# Altium PCB imx6_base_board_lcd7_r1.PcbDoc (part 4 of 6)
Units mil, origin at the board's own origin, x right, y up, seen from the top; angles counter-clockwise.
Board outline 7480.32 x 5118.11 mil, 4 copper layers (Top Layer, Internal Plane 1, Internal Plane 2, Bottom Layer), stack 30.635 mil thick; 518 components, 398 nets, 1886 pads, 1407 vias.
Unrouted connection lines stored in the file: 12.
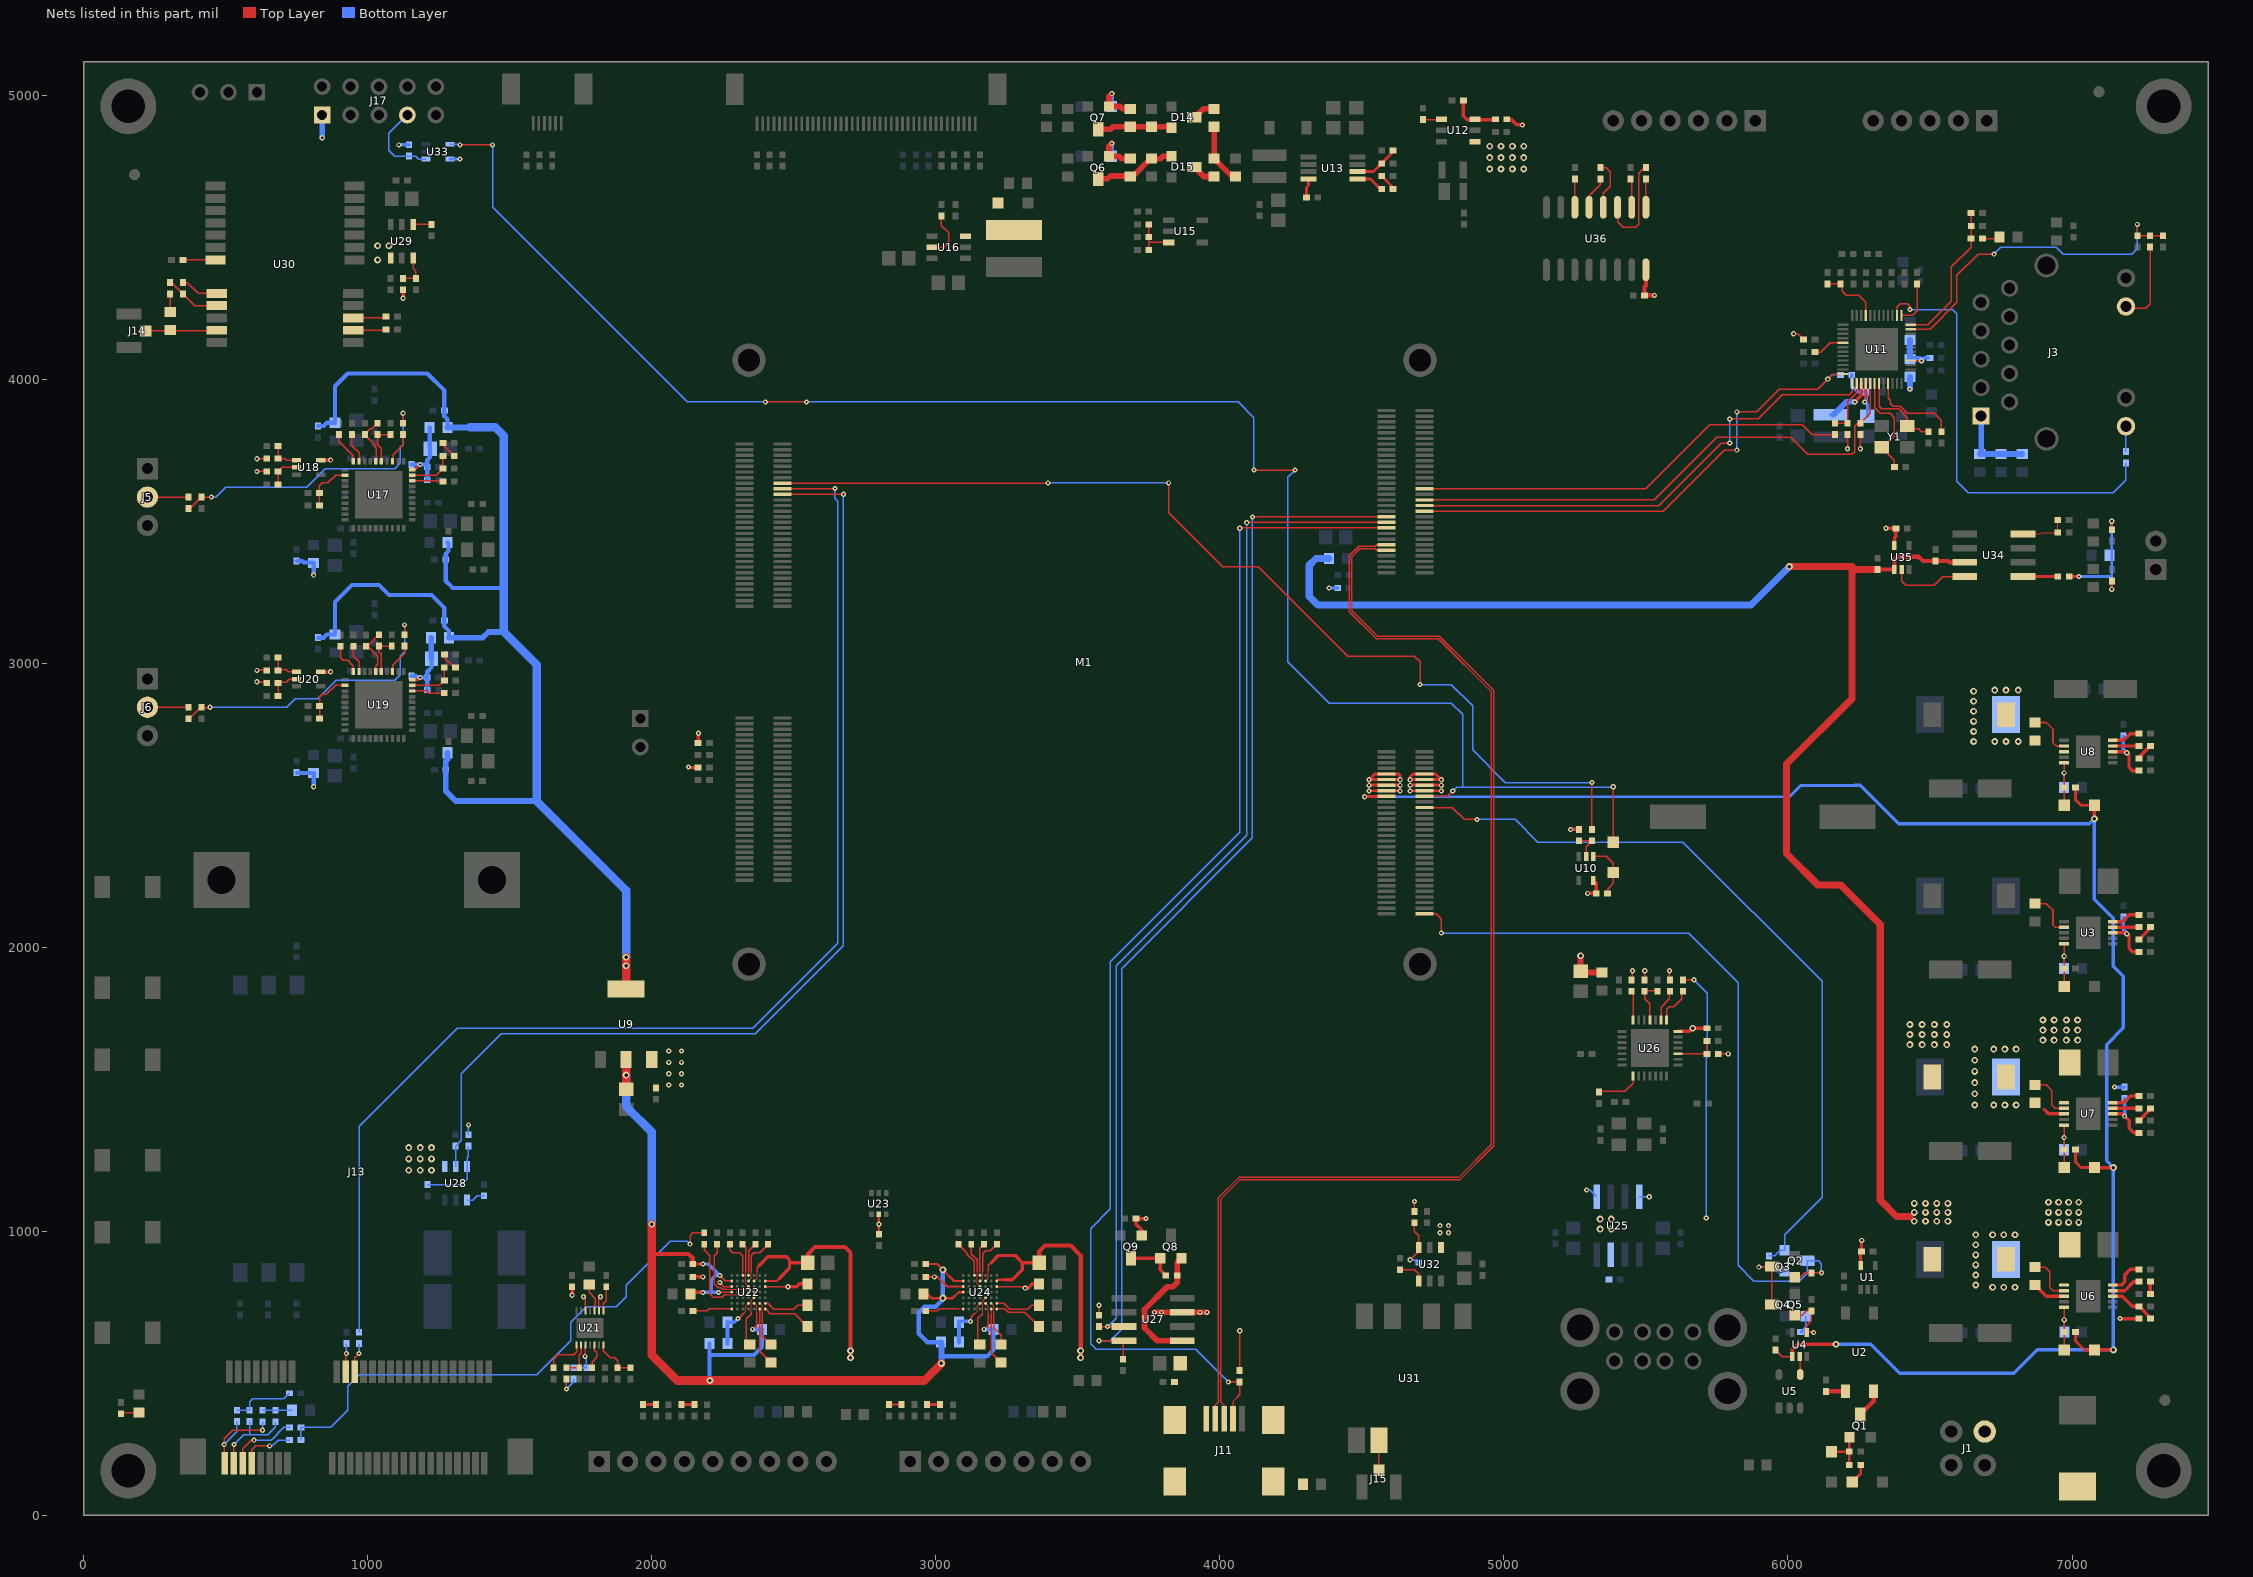
[diagram p6: the nets of this part, all layers, seen from the top]

## Via types
v1: diameter 18, hole 8, Top Layer to Bottom Layer, tented both sides, 875 vias
v2: diameter 24, hole 12, Top Layer to Bottom Layer, tented both sides, 532 vias

## Nets (pads, with @x,y where several pads share a name; then routed paths per layer and width w, separated by ;. In a path a pad name is that pad's centre, name@x,y a point inside that pad or via, vN(x,y) a via of type N, cw(c..) or ccw(c..) an arc to the next point about the centre after c; other vN are vias at no path point) (continued)
NetC3_2: C3.2 U3.2 | length 166.6
  Top Layer w6: C3.2@6870.08,2153.54 6909.45,2153.54 6933.07,2129.92 6933.07,2078.74 6940.94,2070.87 U3.2@6972.44,2070.87
NetC4_1: C4.1 D1.1 R4.1 U3.5 | length 192.9
  Top Layer w6: D1.1@6972.44,1862.2 U3.5@6972.44,2011.81
  Bottom Layer w6: C4.1@6972.44,1925.2 v1(6972.44,1968.5)
NetC5_1: C5.1 R6.1 | length 60
  Top Layer w12: C5.1@7235.97,2027.56 7276.22,2067.81 R6.1@7276.22,2070.87
NetC9_1: C9.1 D7.2 L2.1 U6.3 | length 118.7
  Top Layer w12: C9.1@6870.08,811.02 6909.45,771.65 U6.3@6972.44,771.65
  other v2: 6720.47,803.15 6759.84,803.15 6799.21,803.15 6661.42,811.02 6661.42,846.46 6661.42,881.89 6661.42,917.32 6661.42,952.76 6661.42,988.19 6720.47,988.19 6759.84,988.19 6799.21,988.19
NetC9_2: C9.2 U6.2 | length 168.9
  Top Layer w6: C9.2@6870.08,874.02 6905.51,874.02 6921.26,858.27 6921.26,803.15 6933.07,791.34 U6.2@6972.44,791.34
NetC10_1: C10.1 D6.1 R15.1 U6.5 | length 192.7
  Top Layer w6: U6.5@6972.44,732.28 R15.1@6972.44,645.67 6972.44,583.12 D6.1@6972.88,582.68
  Bottom Layer w6: C10.1@6972.88,645.67 v1(6972.88,688.54)
NetC11_1: C11.1 R17.1 | length 43.3
  Top Layer w12: C11.1@7276.03,779.53 R17.1@7276.03,822.83
NetC15_1: C15.1 D9.2 L3.1 U7.3 | length 77.4
  Top Layer w12: 6901.57,1429.13 6917.32,1413.39 U7.3@6972.44,1413.39
  other v2: 6657.48,1444.88 6724.41,1444.88 6763.78,1444.88 6803.15,1444.88 6657.48,1484.25 6657.48,1523.62 6657.48,1562.99 6657.48,1602.36 6657.48,1641.73 6724.41,1641.73 6763.78,1641.73 6803.15,1641.73
NetC15_2: C15.2 U7.2 | length 166.6
  Top Layer w6: C15.2@6870.08,1515.75 6909.45,1515.75 6929.13,1496.06 6929.13,1444.88 6940.94,1433.08 U7.2@6972.44,1433.08
NetC16_1: C16.1 D8.1 R21.1 U7.5 | length 192.9
  Top Layer w6: D8.1@6972.44,1224.41 U7.5@6972.44,1374.02
  Bottom Layer w6: C16.1@6972.44,1287.4 v1(6972.44,1330.71)
NetC19_1: C19.1 D11.2 L4.1 U8.3
  other v2: 6653.54,2724.41 6728.35,2724.41 6767.72,2724.41 6811.02,2724.41 6653.54,2759.84 6653.54,2795.28 6653.54,2830.71 6653.54,2866.14 6653.54,2901.57 6728.35,2905.51 6767.72,2905.51 6811.02,2905.51
NetC19_2: C19.2 U8.2 | length 164.3
  Top Layer w6: C19.2@6870.08,2791.34 6909.45,2791.34 6933.07,2767.72 6933.07,2720.47 6944.88,2708.67 U8.2@6972.44,2708.67
NetC20_1: C20.1 R22.1 | length 60
  Top Layer w12: C20.1@7235.78,1389.76 7276.03,1430.02 R22.1@7276.03,1433.07
NetC22_1: C22.1 D10.1 R25.1 U8.5 | length 200.8
  Top Layer w6: D10.1@6972.44,2500 v1(6972.44,2614.17) U8.5@6972.44,2649.61
  Bottom Layer w6: C22.1@6972.44,2562.99 v1(6972.44,2614.17)
NetC23_1: C23.1 R27.1 | length 60
  Top Layer w12: C23.1@7235.78,2665.35 7235.78,2668.41 R27.1@7276.03,2708.66
NetC31_1: C31.1 C32.1 L5.2 U11.16 | length 176.3
  Top Layer w4.7: U11.16@6432.54,4065.42 6469.58,4065.42 v1(6470,4065)
  Bottom Layer w12: v1(6470,4065) 6480,4075 C32.1@6494.87,4075
  Bottom Layer w20: C31.1@6430,4138.5 L5.2@6430,4071.5 6463.5,4071.5 v1(6470,4065)
NetC41_1: C41.1 C42.1 C43.1 J3.1 | length 285.6
  Bottom Layer w20: J3.1@6680.09,3870 6680.09,3741.59 C41.1@6675,3736.5 C42.1@6750,3736.5 C43.1@6825,3736.5
NetC45_1: C45.1 U11.6 Y1.1 | length 384.8
  Top Layer w4.7: U11.6@6305.08,3985.2 6305.08,3899.92 6325,3880 6360,3880 6375,3865 6375,3800 6335,3760 Y1.1@6330,3760 6374.87,3715.13 C45.1@6374.87,3690
NetC46_1: C46.1 U11.7 Y1.3 | length 309.4
  Top Layer w4.7: U11.7@6320.82,3985.2 6320.82,3904.18 6330,3895 6390,3895 6420.56,3864.44 Y1.3@6420.56,3834.8 6430.36,3825 6460,3825 6469.87,3815.13 C46.1@6495,3815.13
NetC47_2: C47.2 R61.2 U12.6 | length 174.3
  Top Layer w12: C47.2@4857.47,4980.71 4857.47,4927.53 4871.22,4913.78 4900.59,4913.78 4967.33,4913.78 R61.2@4971.27,4917.72
NetC49_1: C49.1 D14.2 Q7.1 R60.1 | length 263
  Top Layer w20: Q7.1@3572,4880 3615,4880 3623.5,4888.5 R60.1@3685,4888.5 C49.1@3760,4888.5 3826.5,4888.5 D14.2@3830,4885
NetC52_1: C52.1 D15.1 Q6.1 R59.1 | length 292.4
  Top Layer w20: Q6.1@3572,4705 3605,4705 3615,4715 3683.5,4715 R59.1@3685,4713.5 3693.5,4713.5 3756.5,4776.5 C52.1@3760,4776.5 3791.5,4776.5 3800,4785 D15.1@3830,4785
NetC53_1: C53.1 C54.2 R63.1 | length 213.1
  Top Layer w20: C54.2@3980,4888.5 C53.1@3980,4776.5 4042.99,4713.5 R63.1@4055,4713.5
NetC53_2: C53.2 D15.3 | length 83.9
  Top Layer w20: D15.3@3910,4747 3943.5,4713.5 C53.2@3980,4713.5
NetC54_1: C54.1 D14.3 | length 82.2
  Top Layer w20: D14.3@3910,4922 3912,4922 3941.5,4951.5 C54.1@3980,4951.5
NetC59_1: C59.1 R67.2 | length 61.6
  Top Layer w10: C59.1@4569.87,4715 4609.87,4675 R67.2@4609.87,4670
NetC60_1: C60.1 U13.8 | length 67.9
  Top Layer w10: C60.1@4304.87,4640 4305,4640.13 4305,4675 4311.77,4681.77 U13.8@4311.77,4705
NetC62_1: C62.1 R68.2 R70.1 U15.3 | length 160.8
  Top Layer w4.7: R68.2@3749.87,4455 3749.87,4480 ; C62.1@3750.13,4545 3749.87,4544.75 3749.87,4480 ; U15.3@3820,4481.26 3751.13,4481.26 3749.87,4480
NetC66_1: C66.1 U16.5 | length 169.8
  Top Layer w4.7: U16.5@2986.89,4464.37 3029.37,4464.37 3045,4480 3045,4515 3020,4540 C66.1@3020,4574.87
NetC80_1: C80.1 U17.30 | length 114.4
  Top Layer w4.7: C80.1@900,3804.87 900,3780 950,3730 U17.30@950,3711.22
NetC81_1: C81.1 U17.29 | length 103.9
  Top Layer w4.7: C81.1@945,3804.87 945,3765 969.68,3740.31 U17.29@969.68,3711.22
NetC82_1: C82.1 R87.1 R88.2 | length 1025.3
  Top Layer w4.7: R87.1@370,3544.87 375,3544.87 R88.2@415,3584.87 449.87,3584.87 v1(450,3585) ; C82.1@1125,3845.13 v1(1125,3880)
  Bottom Layer w4.7: v1(450,3585) 465,3585 500,3620 785,3620 850,3685 1095,3685 1115,3705 1115,3760 1125,3770 v1(1125,3880)
NetC82_2: C82.2 U17.23 | length 109.3
  Top Layer w4.7: U17.23@1087.8,3711.22 1087.8,3732.8 1125,3770 C82.2@1125,3805.13
NetC83_2: C83.2 R92.2 | length 61.5
  Top Layer w4.7: C83.2@1265.13,3775 1265.13,3769.75 R92.2@1304.87,3730
NetC84_1: C84.1 C87.1 U17.26 | length 172.4
  Top Layer w4.7: U17.26@1028.74,3711.22 1030,3712.48 1030,3756.58 1025.3,3761.28 1025.3,3769.57 C87.1@990,3804.87 1010.13,3825 1014.87,3825 C84.1@1035,3845.13
NetC84_2: C84.2 C85.2 U17.25 | length 144.5
  Top Layer w4.7: U17.25@1048.43,3711.22 1048.43,3756.57 1035,3770 C84.2@1035,3805.13 C85.2@1080,3805.13
NetC86_2: C86.2 R92.1 U17.19 | length 163.1
  Top Layer w4.7: U17.19@1156.69,3662.01 1242.13,3662.01 C86.2@1265.13,3685 1265.13,3729.75 R92.1@1264.87,3730
NetC110_1: C110.1 U19.29 | length 96.8
  Top Layer w4.7: C110.1@950,3059.87 950,3025 969.68,3005.32 U19.29@969.68,2971.22
NetC111_1: C111.1 U19.30 | length 116.1
  Top Layer w4.7: C111.1@905,3059.87 905,3020 915,3010 930,3010 950,2990 U19.30@950,2971.22
NetC112_1: C112.1 R100.1 R101.2 | length 1025.3
  Top Layer w4.7: R100.1@370.71,2803.38 410.71,2843.38 443.38,2843.38 v1(445,2845) ; C112.1@1130,3100.13 v1(1130,3135)
  Bottom Layer w4.7: v1(445,2845) 715,2845 745,2875 825,2875 890,2940 1095,2940 1115,2960 1115,3025 1130,3040 v1(1130,3135)
NetC112_2: C112.2 U19.23 | length 106.4
  Top Layer w4.7: U19.23@1087.8,2971.22 1087.8,2992.8 1130,3035 C112.2@1130,3060.13
NetC113_2: C113.2 R105.2 | length 64.3
  Top Layer w4.7: C113.2@1270.13,3030 1270.13,3019.87 1305,2985 R105.2@1309.87,2985
NetC114_1: C114.1 C117.1 U19.26 | length 167.7
  Top Layer w4.7: C117.1@995,3059.87 C117.1@999.75,3059.87 ; U19.26@1028.74,2971.22 1028.74,2990 1035,2996.26 1035,3025 1000.13,3059.87 C117.1@999.75,3059.87 ; C114.1@1040,3100.13 C117.1@999.75,3059.87
NetC114_2: C114.2 C115.2 U19.25 | length 137.4
  Top Layer w4.7: U19.25@1048.43,2971.22 1048.43,3031.57 1040,3040 C114.2@1040,3060.13 C115.2@1085,3060.13
NetC116_2: C116.2 R105.1 U19.19 | length 166
  Top Layer w4.7: U19.19@1156.69,2922.01 1252.13,2922.01 C116.2@1270.13,2940 1269.87,2940.25 R105.1@1269.87,2985
NetC129_1: C129.1 U21.12 | length 89.8
  Top Layer w4.7: C129.1@1790,520.13 1790,540 1806.35,556.35 1806.35,573.65 1798.51,581.49 U21.12@1798.51,599.92
NetC130_1: C130.1 U21.8 | length 145.4
  Top Layer w4.7: C130.1@1655,520.13 1655,550 1670,565 1725,565 1735.52,575.52 U21.8@1735.52,599.92
NetC131_1: C131.1 U21.3 | length 103.5
  Top Layer w4.7: C131.1@1780,813.5 1780,785 1801.35,763.65 1801.35,741.35 1798.51,738.51 U21.3@1798.51,720
NetC132_1: C132.1 U21.1 | length 89
  Top Layer w4.7: U21.1@1830,720 1830,745 1840,755 C132.1@1840,804.87
NetC136_1: C136.1 R122.1 | length 45
  Top Layer w10: R122.1@2105,390.13 C136.1@2150,390.13
NetC137_1: C137.1 R121.1 | length 45
  Top Layer w10: R121.1@1970,390.13 C137.1@2015,390.13
NetC139_2: C139.2 L18.2 U22.D6 | length 196.2
  Top Layer w3: 2326,713 2331,718 2331,736.63 U22.D6@2340.94,746.57
  Top Layer w4.7: v1(2303.95,693) 2305.95,691 2304,692.95 2304,691 2326,713
  Bottom Layer w12: C139.2@2266.5,680 2290.95,680 v1(2303.95,693)
  Bottom Layer w15: L18.2@2266.5,605 C139.2@2266.5,680
NetC142_1: C142.1 U22.C4 | length 296.7
  Top Layer w3: 2264,796 2350.57,796 U22.C4@2360.63,785.94
  Top Layer w4.7: C142.1@2230,954.87 2230,925 2220,915 2220,815 2233.65,801.35 2243.65,801.35 2249,796 2264,796
NetC143_1: C143.1 U22.D4 | length 331
  Top Layer w3: 2264,776 2331,776 U22.D4@2340.94,785.94
  Top Layer w4.7: C143.1@2185,954.87 2185,935 2205,915 2205,780 2216.35,768.65 2248.65,768.65 2256,776 2264,776
NetC143_2: C143.2 R165.2 R167.2 | length 1885.8
  Top Layer w4.7: v1(2135,955) 2135,985 2144.87,994.87 C143.2@2185,994.87
  Bottom Layer w4.7: R167.2@765,265 R165.2@765,310 870,310 930,370 930,455 970,495 1595,495 1715,615 1715,680 1770,735 1875,735 1910,770 1910,810 2065,965 2125,965 v1(2135,955)
NetC144_1: C144.1 U22.B7 | length 204.8
  Top Layer w4.7: U22.B7@2380.3,726.87 2380.3,578.2 C144.1@2420,538.5
NetC144_2: C144.2 U22.B6 | length 161.6
  Top Layer w3: U22.B6@2380.31,746.57 2389.88,737 2390,737 2390,713
  Top Layer w4.7: 2390,713 2390,631.5 C144.2@2420,601.5
NetC145_2: C145.2 U22.A6 | length 163.7
  Top Layer w4.7: U22.A6@2400,746.57 2408.43,746.57 2430,725 2500,725 2515,740 C145.2@2548.5,740
NetC146_2: C146.2 U22.A7 | length 174.1
  Top Layer w4.7: U22.A7@2400,726.88 2401.12,726.88 2418,710 2503.5,710 C146.2@2548.5,665
NetC148_2: C148.2 U22.C5 | length 180.9
  Top Layer w3: 2351,715 2351,757 2360.25,766.25 U22.C5@2360.63,766.25
  Top Layer w4.7: C148.2@2345,601.5 2333.65,612.85 2333.65,691.65 2351,709 2351,715
NetC152_1: C152.1 R132.1 | length 45
  Top Layer w10: R132.1@2970,390.13 C152.1@3015,390.13
NetC153_1: C153.1 R134.1 | length 45
  Top Layer w8: R134.1@2835,390.13 C153.1@2880,390.13
NetC155_2: C155.2 L20.2 U24.D6 | length 194.7
  Top Layer w3: 3136.96,709.48 3146.44,718.96 3146.44,737.07 U24.D6@3155.94,746.57
  Top Layer w4.7: v1@3118,683 v1(3122.6,683) 3122.6,696.32 3136.36,710.08
  Bottom Layer w12: C155.2@3081.5,680 3084.5,683 v1(3122.6,683)
  Bottom Layer w15: L20.2@3081.5,610 C155.2@3081.5,680
NetC158_1: C158.1 U24.B7 | length 203
  Top Layer w3: 3195,710 3195.31,710.31 U24.B7@3195.31,726.88
  Top Layer w4.7: 3195,710 3195,573.5 C158.1@3230,538.5
NetC158_2: C158.2 U24.B6 | length 159.4
  Top Layer w3: U24.B6@3195.31,746.57 3205,736.88 3205,710
  Top Layer w4.7: 3205,710 3205,660 3230,635 C158.2@3230,601.5
NetC159_2: C159.2 U24.A6 | length 163.8
  Top Layer w4.7: U24.A6@3215,746.57 3215,746.37 3238.63,746.37 3260,725 3323.12,725 3338.12,740 C159.2@3363.5,740
NetC160_2: C160.2 U24.A7 | length 174.1
  Top Layer w4.7: U24.A7@3215,726.88 3243.12,726.88 3255,715 3313.5,715 C160.2@3363.5,665
NetC161_2: C161.2 U24.C5 | length 178.6
  Top Layer w3: 3165,710 3165.44,710.44 3165.44,755.44 3175.63,765.63 U24.C5@3175.63,766.25
  Top Layer w4.7: C161.2@3155,601.5 3148.65,607.85 3148.65,693.65 3165,710
NetC178_2: C178.2 R158.2 U28.6 | length 265.5
  Bottom Layer w4.7: C178.2@1210,1164.87 1329.87,1164.87 1350,1185 U28.6@1350,1228.11 1350,1260 1355,1265 R158.2@1355,1300.13
NetC185_1: C185.1 R161.1 R162.1 | length 227.1
  Bottom Layer w4.7: R161.1@540,370.25 R162.1@585,370.25 585,400 595,410 704.75,410 C185.1@724.87,430.13
NetC186_1: C186.1 R163.2 R164.2 | length 103.6
  Bottom Layer w4.7: R163.2@630,370 R164.2@675,370 733.38,370 C186.1@733.5,370.13
NetC187_2: C187.2 R170.2 U29.6 | length 121.2
  Top Layer w4.7: R170.2@1125,4354.87 C187.2@1170,4354.87 1170,4380 1160,4390 U29.6@1160,4426.89
NetC190_2: C190.2 R178.2 U32.6 | length 185.1
  Top Layer w4.7: v1(4670,900) 4700,930 U32.6@4700,943.11 4700,985 4685,1000 R178.2@4685,1030.13
  Bottom Layer w4.7: v1(4670,900) 4685.13,900 C190.2@4700.13,885
NetC198_1: C198.1 R182.2 R183.1 R184.1 | length 449.9
  Top Layer w10: R183.1@6990.13,3305 v1(7025,3305) ; v1(7140,3260) R184.1@7140,3289.87 ; R182.2@7140,3469.87 v1(7140,3500)
  Bottom Layer w10: v1(7025,3305) 7140,3305 ; v1(7140,3260) 7140,3305 ; v1(7140,3500) 7140,3305
NetC200_1: C200.1 U36.1 | length 99.9
  Top Layer w4.7: U36.1@5500,4605 C200.1@5500,4704.87
NetC200_2: C200.2 U36.3 | length 350.7
  Top Layer w4.7: U36.3@5400,4605 5400,4555 5420,4535 5465,4535 5475,4545 5475,4725 5494.87,4744.87 C200.2@5500,4744.87
NetC201_1: C201.1 U36.2 | length 101.9
  Top Layer w4.7: C201.1@5445,4704.87 5450,4699.87 U36.2@5450,4605
NetC202_1: C202.1 U36.6 | length 99.9
  Top Layer w4.7: U36.6@5250,4605 C202.1@5250,4704.87
NetC203_1: C203.1 U36.4 | length 176.6
  Top Layer w4.7: C203.1@5340,4745.13 5359.87,4745.13 5375,4730 5375,4680 5350,4655 U36.4@5350,4605
NetC203_2: C203.2 U36.5 | length 116.7
  Top Layer w4.7: U36.5@5300,4605 5300,4645 5340,4685 C203.2@5340,4705.13
NetD2_2: D2.2 R5.2 | length 71.4
  Top Layer w10: D2.2@6226.38,118.11 6256.09,147.83 R5.2@6256.09,177.17
NetD4_2: D4.2 Q1.2 R5.1 R7.1 | length 161.2
  Top Layer w10: D4.2@6153.54,224.41 R7.1@6216.09,224.41 ; R5.1@6216.09,177.17 R7.1@6216.09,224.41 ; Q1.2@6216.54,275.59 6216.09,275.15 R7.1@6216.09,224.41
NetD5_1: D5.1 J1.3
NetD12_1: D12.1 R31.2 U10.1 | length 193.7
  Top Layer w4.7: U10.1@5315,2320 5360,2320 5385,2295 D12.1@5385,2263.7 5385,2225 5364.87,2204.87 R31.2@5364.87,2190
NetD13_1: D13.1 R45.2 | length 62.2
  Top Layer w4.7: R45.2@6684.87,4495 6740,4495 D13.1@6745,4500
NetD16_2: D16.2 Q6.2 R59.2 | length 173.4
  Top Layer w20: v1(3620,4830) 3610,4820 Q6.2@3610,4785 3645,4785 3653.5,4776.5 R59.2@3685,4776.5
  Bottom Layer w20: D16.2@3618.15,4785 3618.15,4828.15 v1(3620,4830)
NetD17_1: D17.1 Q7.2 R60.2 | length 173.4
  Top Layer w20: v1(3620,5005) 3610,4995 Q7.2@3610,4960 3650,4960 3658.5,4951.5 R60.2@3685,4951.5
  Bottom Layer w20: D17.1@3618.15,4960 3618.15,5003.15 v1(3620,5005)
NetD19_1: D19.1 L9.2 U16.3
NetD20_1: D20.1 R166.2 | length 64.7
  Top Layer w4.7: R166.2@132.01,357.88 136.13,362.01 D20.1@195,362.01
NetJ3_11: J3.11 R37.2 | length 89.3
  Bottom Layer w4.7: J3.11@7189.93,3834.17 7190,3834.1 R37.2@7190,3744.87
NetJ3_13: J3.13 R35.2 | length 293.8
  Top Layer w4.7: J3.13@7189.93,4255.83 7195.76,4250 7260,4250 7275,4265 R35.2@7275,4465.13
NetJ5_2: J5.2 R87.2 | length 145.1
  Top Layer w4.7: J5.2@225,3585 369.87,3585 R87.2@370,3584.87
NetJ6_2: J6.2 R100.2 | length 146.2
  Top Layer w4.7: J6.2@225.04,2844.76 369.32,2844.76 R100.2@370.71,2843.38
NetJ13_1: J13.1 R161.2 R163.1 | length 367.4
  Top Layer w4.7: J13.1@497.56,183.58 495,186.14 v1(495,250) ; v1@497.56,247.44 v1(495,250) ; v1(630,300) 525,300 495,270 v1(495,250)
  Bottom Layer w4.7: v1(495,250) 540,295 R161.2@540,330.25 ; v1(630,300) R163.1@630,330
NetJ13_3: J13.3 R162.2 R164.1 | length 303.3
  Top Layer w4.7: J13.3@529.06,183.58 529.06,249.06 v1(530,250)
  Bottom Layer w4.7: v1(530,250) 563.65,283.65 585,283.65 ; R162.2@585,330.25 585,283.65 ; R164.1@675,330 675,310 648.65,283.65 585,283.65
NetJ13_5: J13.5 R165.1 | length 247.3
  Top Layer w4.7: J13.5@560.55,183.58 560.55,235.55 590,265 v1(600,265)
  Bottom Layer w4.7: v1(600,265) 660,265 705,310 R165.1@725,310
NetJ13_7: J13.7 R167.1 | length 194.3
  Top Layer w4.7: J13.7@592.05,183.58 592.05,230.7 606.35,245 v1(655,245)
  Bottom Layer w4.7: v1(655,245) 665,245 685,265 R167.1@725,265
NetJ13_20: J13.20 R168.1 | length 99.4
  Top Layer w4.7: J13.20@922.76,506.42 922.76,567.76 v1(925,570)
  Bottom Layer w4.7: v1(925,570) R168.1@925,604.87
NetJ13_22: J13.22 R169.1 | length 105
  Top Layer w4.7: J13.22@954.25,506.42 954.25,554.25 v1(970,570)
  Bottom Layer w4.7: v1(970,570) R169.1@970,604.87
NetJ14_1: J14.1 L24.2 U30.11 | length 250.8
  Top Layer w4.7: J14.1@219.06,4170 466.81,4170 U30.11@468.94,4172.13
NetJ15_1: J15.1 U31.5 | length 105.5
  Top Layer w4.7: J15.1@4560,159.06 4560.35,159.41 U31.5@4560.35,264.37
NetJ17_7: J17.7 R181.2 U33.1 | length 294.4
  Bottom Layer w4.7: J17.7@1140,4930 1075,4865 1075,4805 1094.87,4785.13 R181.2@1145,4785.13 1169.87,4785.13 1180,4775 U33.1@1205,4775
NetL6_1: L6.1 U11.3 | length 178.3
  Top Layer w12: v1(6235,3920) 6257.83,3942.83 U11.3@6257.83,3985.2
  Bottom Layer w12: L6.1@6150,3875 L6.1@6160,3875
  Bottom Layer w20: L6.1@6160,3875 6205,3920 v1(6235,3920)
NetL24_1: L24.1 R176.1 | length 63.4
  Top Layer w4.7: L24.1@305,4236.5 R176.1@305,4299.87
NetQ1_1: Q1.1 U2.2 | length 101.1
  Top Layer w15: Q1.1@6254.54,355.59 6301.97,403.02 U2.2@6301.97,437.01
NetQ2_1: Q2.1 Q3.1 Q4.1 R11.2 | length 278
  Top Layer w4.7: v1(5897.64,874.02) 5941.06,874.02 Q3.1@5943.62,876.58 Q4.1@5943.62,742.72
  Bottom Layer w4.7: v1(5897.64,874.02) 5897.83,873.83 R11.2@5933.07,873.83 5949.01,873.83 5964.57,858.27 Q2.1@5988.19,858.27
NetQ4_2: Q4.2 Q5.2 R13.1 R16.1 U4.4 | length 282.1
  Top Layer w4.7: Q4.2@6023.62,704.72 6051.18,704.72 6066.49,720.03 R13.1@6082.68,720.03 6082.68,685.04 6066.94,669.31 U4.4@6066.94,644.06 v1(6090.55,644.06)
  Bottom Layer w4.7: Q5.2@6062.99,700.79 6062.99,664.91 R16.1@6043.75,645.67 6045.36,644.06 v1(6090.55,644.06)
NetQ8_1: Q8.1 Q9.1 R153.1 | length 171.2
  Top Layer w12: Q9.1@3687,905 Q8.1@3790,905 3790,864.87 R153.1@3809.87,845
NetR1_2: R1.2 U2.1 | length 68.2
  Top Layer w15: R1.2@6133.86,436.82 6134.05,437.01 U2.1@6201.97,437.01
NetR6_2: R6.2 U3.9 | length 92.9
  Top Layer w12: U3.9@7143.34,2070.87 R6.2@7236.22,2070.87
NetR8_2: R8.2 R10.2 U3.8 | length 209.7
  Top Layer w12: U3.8@7143.34,2051.18 7188.98,2051.18 v1(7192.91,2047.24) 7200.79,2039.37 7200.79,1996.06 7212.6,1984.25 R10.2@7236.22,1984.25
  Bottom Layer w12: R8.2@7181.1,2106.11 7181.1,2062.99 7192.91,2051.18 v1(7192.91,2047.24)
NetR9_1: R9.1 U3.10 | length 102.4
  Top Layer w12: U3.10@7143.34,2090.55 7177.17,2090.55 7200.79,2114.17 R9.1@7235.97,2114.17
NetR17_2: R17.2 U6.9 | length 105.7
  Top Layer w12: U6.9@7143.34,791.34 7185.04,791.34 7216.54,822.83 R17.2@7236.03,822.83
NetR18_2: R18.2 R20.2 U6.8 | length 167.1
  Top Layer w12: U6.8@7143.34,771.65 7177.17,771.65 7212.6,736.22 R20.2@7236.03,736.22 7275.78,696.47 R18.2@7275.78,692.91
NetR19_1: R19.1 U6.10 | length 129.1
  Top Layer w12: U6.10@7143.34,811.02 7173.23,811.02 7185.04,822.83 7185.04,846.46 7204.72,866.14 R19.1@7235.78,866.14
NetR22_2: R22.2 U7.9 | length 92.7
  Top Layer w12: U7.9@7143.34,1433.08 R22.2@7236.03,1433.08
NetR23_2: R23.2 R26.2 U7.8 | length 199
  Top Layer w12: U7.8@7143.34,1413.39 7177.17,1413.39 v1(7185.04,1405.51) 7201.1,1389.45 7201.1,1362.52 7217.17,1346.46 R26.2@7236.03,1346.46
  Bottom Layer w12: v1(7185.04,1405.51) R23.2@7185.04,1468.32
NetR24_1: R24.1 U7.10 | length 102.2
  Top Layer w12: U7.10@7143.34,1452.76 7181.1,1452.76 7204.72,1476.38 R24.1@7235.78,1476.38
NetR27_2: R27.2 U8.9 | length 92.7
  Top Layer w12: U8.9@7143.34,2708.67 R27.2@7236.03,2708.66
NetR28_2: R28.2 R30.2 U8.8 | length 209.5
  Top Layer w12: U8.8@7143.34,2688.98 7188.98,2688.98 v1(7192.91,2685.04) 7200.79,2677.17 7200.79,2633.86 7212.6,2622.05 R30.2@7236.03,2622.05
  Bottom Layer w12: R28.2@7181.1,2743.91 7181.1,2696.85 v1(7192.91,2685.04)
NetR29_1: R29.1 U8.10 | length 102.2
  Top Layer w12: U8.10@7143.34,2728.35 7181.1,2728.35 7204.72,2751.97 R29.1@7235.78,2751.97
NetR32_2: R32.2 R33.2 U10.2 | length 108.7
  Top Layer w4.7: R32.2@5265,2375.13 R33.2@5310,2375.13 5289.4,2354.53 U10.2@5289.4,2320
NetR36_1: R36.1 U11.41 | length 112.1
  Top Layer w4.7: R36.1@6095.13,4095 6115,4095 6148.41,4128.41 U11.41@6193.36,4128.41
NetR40_1: R40.1 R42.2 U11.2 | length 198.7
  Top Layer w4.7: R42.2@6165,3845.13 6165.25,3844.87 6210,3844.87 6210,3920 6242.08,3952.08 U11.2@6242.08,3985.2
NetR44_2: R44.2 U11.25 | length 157
  Top Layer w4.7: U11.25@6399.56,4224.38 6439.38,4224.38 6455,4240 R44.2@6455,4335.13
NetR46_2: R46.2 U11.9 | length 318.4
  Top Layer w4.7: U11.9@6352.32,3985.2 6352.32,3932.68 6360,3925 6360,3915 6370.3,3904.7 6395.3,3904.7 6420,3880 6515,3880 6540,3855 R46.2@6540,3814.87
NetR62_2: R62.2 U12.1 | length 67
  Top Layer w4.7: R62.2@4715.55,4913.59 4715.74,4913.78 U12.1@4782.48,4913.78
NetR66_2: R66.2 R69.1 U13.2 | length 158.6
  Top Layer w10: U13.2@4485,4730.59 4540.46,4730.59 R69.1@4569.87,4760 4609.87,4800 R66.2@4609.87,4805
NetR67_1: R67.1 U13.1 | length 99.4
  Top Layer w10: U13.1@4485,4705 4530,4705 4565,4670 R67.1@4569.87,4670
NetR89_1: R89.1 R90.1 U17.32 | length 175.9
  Top Layer w4.7: R89.1@830.13,3555 830,3555.13 830,3625 840,3635 860,3635 887.01,3662.01 U17.32@920.47,3662.01
NetR91_1: R91.1 U17.18 | length 109.1
  Top Layer w4.7: U17.18@1156.69,3642.32 1262.55,3642.32 R91.1@1264.87,3640
NetR93_2: R93.2 R95.2 U18.1 | length 112.2
  Top Layer w4.7: R95.2@684.87,3765 R93.2@684.87,3720 710,3720 715,3715 U18.1@750,3715
NetR94_2: R94.2 R96.2 U18.2 | length 116.1
  Top Layer w4.7: R96.2@684.87,3630 R94.2@684.87,3675 699.28,3689.4 U18.2@750,3689.4
NetR102_1: R102.1 R103.1 U19.32 | length 175.4
  Top Layer w4.7: R102.1@831.78,2811.69 831.78,2881.78 840,2890 855,2890 887.01,2922.01 U19.32@920.47,2922.01
NetR104_1: R104.1 U19.18 | length 116.2
  Top Layer w4.7: U19.18@1156.69,2902.32 1207.68,2902.32 1215,2895 R104.1@1269.87,2895
NetR106_2: R106.2 R108.2 U20.1 | length 109.6
  Top Layer w4.7: R108.2@685.86,3020.35 685.86,2977.24 685.67,2977.05 712.95,2977.05 720,2970 747.83,2970 U20.1@748.66,2969.17
NetR107_2: R107.2 R109.2 U20.2 | length 110.5
  Top Layer w4.7: R109.2@685.86,2890.43 685.67,2890.62 685.67,2933.74 713.74,2933.74 723.58,2943.58 U20.2@748.66,2943.58
NetR113_2: R113.2 R119.1 U21.9 | length 127.5
  Top Layer w4.7: R113.2@1700,519.87 1700.25,520.13 R119.1@1745,520.13 1745,565 1751.26,571.26 U21.9@1751.26,599.92
NetR114_2: R114.2 R118.1 U21.10 | length 127.8
  Top Layer w4.7: v1(1765,560) 1767.01,562.01 U21.10@1767.01,599.92
  Bottom Layer w4.7: R114.2@1725,519.87 1725.25,520.13 R118.1@1770,520.13 1770,555 v1(1765,560)
NetR115_1: R115.1 R117.1 U21.14 | length 154.3
  Top Layer w4.7: U21.14@1830,599.92 1830,580 1855,555 1870,555 1880,545 R115.1@1880,520.13 R117.1@1925,520.13
NetR126_1: R126.1 U22.E1 | length 143.7
  Top Layer w3: U22.E1@2321.25,845 2321.25,858.75
  Top Layer w4.7: R126.1@2275,954.87 2275,934.94 2284.94,925 2310,925 2321.25,913.75 2321.25,858.75
NetR127_1: R127.1 U22.D3 | length 157.9
  Top Layer w3: 2331,859.1 2331,815.57 U22.D3@2340.94,805.63
  Top Layer w4.7: R127.1@2320,954.87 2331,943.87 2331,859.1
NetR128_1: R128.1 U22.D1 | length 119.8
  Top Layer w3: U22.D1@2340.94,845 2340.94,858.94 2341,859
  Top Layer w4.7: 2341,859 2341,930.87 R128.1@2365,954.87
NetR129_1: R129.1 U22.D2 | length 170.2
  Top Layer w3: U22.D2@2340.94,825.31 2341.31,825.31 2351,835 2351,859
  Top Layer w4.7: 2351,859 2351,916 2360,925 2380.13,925 R129.1@2410,954.87
NetR130_1: R130.1 U22.G7 | length 139.6
  Top Layer w4.7: R130.1@2145.13,720 2195,720 2201.88,726.88 U22.G7@2281.88,726.88
NetR137_1: R137.1 U24.E1 | length 133.1
  Top Layer w3: U24.E1@3136.25,845 3136.25,858.75
  Top Layer w4.7: R137.1@3080,954.87 3110,924.87 3110,920 3136.05,893.95 3136.05,858.75
NetR138_1: R138.1 U24.D3 | length 162.1
  Top Layer w3: 3145.75,859.25 3145.75,815.82 U24.D3@3155.94,805.63
  Top Layer w4.7: R138.1@3125,954.87 3125,920 3145.75,899.25 3145.75,859.25
NetR139_1: R139.1 U24.D1 | length 115.8
  Top Layer w3: U24.D1@3155.94,845 3155.94,859.06
  Top Layer w4.7: 3155.74,859.06 3155.74,940.61 R139.1@3170,954.87
NetR140_1: R140.1 U24.D2 | length 162.9
  Top Layer w3: U24.D2@3155.94,825.31 3165.44,834.81 3165.44,860
  Top Layer w4.7: 3165.44,860 3165.44,920.44 3176.35,931.35 3191.48,931.35 R140.1@3215,954.87
NetR141_1: R141.1 U24.G7 | length 134.6
  Top Layer w3: 3076.88,726.88 U24.G7@3096.88,726.88
  Top Layer w4.7: R141.1@2965.13,720 3005,720 3011.88,726.88 3076.88,726.88
NetR145_1: R145.1 R146.1 U26.17 | length 148.7
  Top Layer w4.7: U26.17@5612.34,1625.98 5712.15,1625.98 5716.09,1629.92 R146.1@5716.09,1673.23
NetR147_2: R147.2 U26.22 | length 133.4
  Top Layer w4.7: U26.22@5572.97,1744.1 5572.97,1781.63 5582.68,1791.34 5598.43,1791.34 5625.98,1818.9 R147.2@5625.98,1846.27
NetR148_2: R148.2 U26.23 | length 114.3
  Top Layer w4.7: U26.23@5553.28,1744.1 5553.28,1789.5 5582.68,1818.9 R148.2@5582.68,1846.27
NetR149_2: R149.2 R150.2 U26.25 | length 152.9
  Top Layer w4.7: U26.25@5513.91,1744.1 5513.91,1801.05 5496.06,1818.9 5496.06,1846.27 R150.2@5539.37,1846.27
NetR151_2: R151.2 U26.28 | length 103
  Top Layer w4.7: R151.2@5452.76,1846.27 5454.85,1844.17 U26.28@5454.85,1744.1
NetR152_1: R152.1 U26.8 | length 157.8
  Top Layer w4.7: R152.1@5334.65,1492.57 5425.64,1492.57 5454.85,1521.78 U26.8@5454.85,1547.24
NetR159_2: R159.2 U28.1 | length 66.3
  Bottom Layer w4.7: U28.1@1350,1110 1370,1110 1385.13,1125.13 R159.2@1410,1125.13
NetR171_1: R171.1 U30.14 | length 116.8
  Top Layer w4.7: U30.14@949.25,4172.13 1062,4172.13 R171.1@1064.87,4175
NetR172_2: R172.2 U29.1 | length 65.1
  Top Layer w4.7: U29.1@1160,4545 1224.87,4545 R172.2@1225,4544.87
NetR173_1: R173.1 U30.15 | length 117.5
  Top Layer w4.7: U30.15@949.25,4215.43 1060.31,4215.43 R173.1@1064.87,4220
NetR174_1: R174.1 R176.2 U30.9 | length 197.5
  Top Layer w4.7: R176.2@305,4339.87 310,4339.87 R174.1@350,4299.87 391.13,4258.74 U30.9@468.94,4258.74
NetR174_2: R174.2 U30.8 | length 134.6
  Top Layer w4.7: R174.2@350,4339.87 365.13,4339.87 402.95,4302.05 U30.8@468.94,4302.05
NetR175_2: R175.2 U30.7 | length 115.2
  Top Layer w4.7: R175.2@349.87,4420 464.84,4420 U30.7@465,4420.16
NetR179_2: R179.2 U32.1 | length 96.3
  Top Layer w4.7: R179.2@4635,865.13 4684.87,865.13 4700,850 U32.1@4700,825
NetR183_2: R183.2 U34.5 | length 122.8
  Top Layer w10: U34.5@6827.36,3305 R183.2@6950.13,3305
NetR185_2: R185.2 R186.1 U34.8 | length 169.9
  Top Layer w3.8: U34.8@6827.36,3455 6890,3455 6895,3460 R185.2@6950.13,3460 6949.87,3460.25 R186.1@6949.87,3505
NetU4_2: U4.2 U5.4 | length 63.8
  Top Layer w4.7: U4.2@6041.35,559.06 6043.31,557.09 U5.4@6043.31,496.06
NetU34_4: U34.4 U35.2 | length 281
  Top Layer w4.7: U35.2@6400.6,3330 6400.6,3289.4 6415,3275 6515,3275 6545,3305 U34.4@6622.64,3305
OTG-ID: J11.4 M1.C43 R155.2 | length 4325.5
  Top Layer w4.7: v1(4030,470) 4069.87,470 R155.2@4070,470.13 ; v1(4070,3475) 4071.38,3476.38 M1.C43@4586.61,3476.38
  Top Layer w5.3: J11.4@4046.5,340 4046.5,401.5 4070,425 R155.2@4070,470.13
  Bottom Layer w4.7: v1(4030,470) 3915,585 3565,585 3545,605 3545,1010 3615,1080 3615,1950 4070,2405 v1(4070,3475)
OTG-OC: M1.C41 R156.1 U27.3 | length 3612.7
  Top Layer w4.7: R156.1@3575,664.87 3662.51,664.87 U27.3@3662.64,665 ; v1(4095,3495) 4096.06,3496.06 M1.C41@4586.61,3496.06
  Bottom Layer w4.7: v1(3605,665) 3635,695 3635,1935 4095,2395 v1(4095,3495)
OTG-PWREN: M1.C39 R157.2 U27.4 | length 3767.6
  Top Layer w4.7: v1(3575,615) 3657.36,615 3660,612.36 R157.2@3660,549.87 ; v1(4115,3515) 4115.75,3515.75 M1.C39@4586.61,3515.75
  Bottom Layer w4.7: v1(3575,615) 3615,615 3655,655 3655,1925 4115,2385 v1(4115,3515)
OTG-SH-GND: J11.6 J11.7 J11.8 J11.9 L25.2
OTG_N: J11.2 M1.C49 | length 4374.6
  Top Layer w5.3: J11.2@3983.5,340 3983.5,387.93 3994.75,399.17 3994.75,1117.48 4067.27,1190 4840,1190 4955,1305 4955,2900 4769,3086 4551.27,3086 4456,3181.27 4456,3378.73 4489.25,3411.98 4547.13,3411.98 4552.47,3417.32 M1.C49@4586.61,3417.32
OTG_P: J11.3 M1.C51 | length 4359.7
  Top Layer w5.3: J11.3@4015,340 4015,387.93 4003.75,399.17 4003.75,1113.75 4071,1181 4843.73,1181 4964,1301.27 4964,2903.73 4869,2998.73 4772.73,3095 4555,3095 4465,3185 4465,3375 4492.98,3402.98 4547.13,3402.98 4552.47,3397.64 M1.C51@4586.61,3397.64
OTGVBUS: C176.1 C177.1 J11.1 Q8.2 R153.2 U27.5 | length 461.6
  Top Layer w20: Q8.2@3865,905 3849.87,889.87 R153.2@3849.87,845 3849.87,819.87 3835,805 3815,805 3735,725 3735,660 3780,615 U27.5@3867.36,615
P1V8: C26.1 C70.1 C77.1 C78.1 C107.1 C108.1 C109.1 C138.2 C140.2 C141.2 C154.2 C156.2 C157.2 L10.1 L11.1 L12.1 L14.1 L15.1 L16.1 L18.1 L20.1 U9.2 U9.4 U22.C6 U22.G2 U22.G4 U24.C6 U24.G2 U24.G4 | length 9318.1
  Top Layer w3: U22.C6@2360.63,746.57 2370,737.2 2370,730.94 2370.13,730.81 2370.13,722.81 2370,722.68 2370,713 ; U24.C6@3175.63,746.57 3185.13,737.07 3185.13,710.13 3185,710
  Top Layer w4.7: v1(2235,785) 2235.94,785.94 U22.G4@2281.88,785.94 ; v1(2240,845) 2259.69,825.31 U22.G2@2281.88,825.31 ; v1(2355,655) 2370,670 2370,713 ; v1(3170,655) 3185,670 3185,710
  Top Layer w8: C157.2@2956.5,780 2961.5,775 2975,775 2985,765 3060,765 3080.94,785.94 U24.G4@3096.88,785.94 ; C154.2@2964.87,885 3005,885 v2(3025,865) 3064.69,825.31 U24.G2@3096.88,825.31
  Top Layer w12: C141.2@2136.5,780 2141.5,785 v1(2180,785) ; C138.2@2144.87,885 v1(2180,885)
  Top Layer w15: 2000,925 2005,920 2130,920 2144.87,905.13 C138.2@2144.87,885
  Top Layer w30: C26.1@1910,1500 v2(1910,1550) U9.2@1910,1605 ; U9.4@1910,1853.03 v2(1910,1935) v2(1910,1965) ; v2(2000,1025) 2000,925 2000,565 2090,475 v2(2205,475) 2960,475 v2(3020,535)
  Bottom Layer w12: v1(2180,785) 2210,785 ; v1(2180,885) 2200,885 v1(2240,845) 2225,845 2210,830 2210,785 ; v1(2235,785) 2210,785
  Bottom Layer w15: C108.1@825,3090.13 845.13,3090.13 856.5,3101.5 L16.1@885,3101.5 885,3215 945,3275 1040,3275 1075,3240 1225,3240 1270.13,3194.87 C107.1@1270.13,3150 1270.13,3129.87 1286.5,3113.5 L15.1@1286.5,3090 ; C78.1@825,3835.13 845.13,3835.13 856.5,3846.5 L12.1@885,3846.5 885,3975 930,4020 1210,4020 1270.13,3959.87 C77.1@1270.13,3890 1270.13,3869.87 1281.5,3858.5 L11.1@1281.5,3830 ; L10.1@1281.5,3425 1285,3421.5 1285,3395 1275.13,3385.13 C70.1@1275.13,3365 1275.13,3289.87 1300,3265 1480,3265 ; 1480,3110 1485,3105 ; L18.1@2203.5,605 2203.5,565 ; v2(2205,475) 2203.5,476.5 2203.5,565 ; v1(2355,655) C140.2@2388.5,655 2388.5,593.5 2360,565 2203.5,565 ; L20.1@3018.5,610 2970,610 2940,640 2940,715 2960,735 3000,735 3025,760 v2(3025,865) ; 3020,560 3180,560 3203.5,583.5 C156.2@3203.5,655 v1(3170,655)
  Bottom Layer w20: L14.1@1281.5,2685 1281.5,2661.5 1275,2655 1275,2625.13 C109.1@1275.13,2625 1275.13,2549.87 1310,2515 1595,2515 ; L11.1@1281.5,3830 1360,3830 ; L15.1@1286.5,3090 1405,3090 1425,3110 1480,3110 ; L20.1@3018.5,610 3015,606.5 3020,601.5 3020,560 v2(3020,535)
  Bottom Layer w30: 1360,3830 1450,3830 1480,3800 1480,3265 1480,3110 ; 1485,3105 1595,2995 1595,2515 1910,2200 v2(1910,1965) ; v2(1910,1550) 1910,1440 2000,1350 v2(2000,1025)
  other v2: 3025,765
P2V8-OUT: D6.2 D8.2 D10.2 M1.D17 R12.1 R15.2 R21.2 R25.2 U4.1 | length 6508.5
  Top Layer w4.7: R12.1@5956.69,582.24 5979.87,559.06 U4.1@6015.75,559.06
  Top Layer w10: v1(4510,2530) 4511,2531 4586.61,2531 M1.D17@4586.61,2531.5 ; R21.2@7012,1287.4 7012,1243.91 7031.5,1224.41 D8.2@7078.74,1224.41 ; R25.2@7012,2562.99 7012,2519.5 7031.5,2500 D10.2@7078.74,2500 ; R15.2@7012.44,645.67 7012.44,613.98 7043.75,582.68 D6.2@7079.18,582.68
  Top Layer w12: U4.1@6015.75,559.06 6015.75,582.68 6035.43,602.36 v2(6169.29,602.36) ; D8.2@7078.74,1224.41 v2(7145.67,1224.41) ; v2(7078.74,2452.76) D10.2@7078.74,2500 ; D6.2@7079.18,582.68 v2(7145.67,582.68)
  Bottom Layer w10: v1(4510,2530) 6005,2530 6045,2570 6235,2570
  Bottom Layer w12: v2(6169.29,602.36) 6291.34,602.36 6393.7,500 6795.28,500 6877.95,582.68 v2(7145.67,582.68) v2(7145.67,1224.41) 7122.05,1248.03 7122.05,1657.48 7181.1,1716.54 7181.1,1897.64 7145.67,1933.07 7145.67,2102.36 7078.74,2169.29 v2(7078.74,2452.76) 7060.98,2435 6390,2435 6255,2570 6235,2570
P3V3: C21.1 C27.1 C35.1 C36.1 C68.1 C98.1 C128.2 C134.2 C135.2 C147.1 C150.2 C151.2 C162.2 C170.1 C196.1 C199.1 J17.1 L3.2 L5.1 L13.1 L17.1 L22.1 M1.D9 M1.D10 M1.D11 M1.D12 M1.D13 M1.D14 M1.D15 M1.D16 Q9.2 R3.1 R23.1 R31.1 R32.1 R38.2 R39.2 R40.2 R41.2 R61.1 R93.1 R94.1 R106.1 R107.1 R113.1 R114.1 R142.2 R145.2 R148.1 R149.1 R151.1 R154.2 R155.1 R156.2 R158.1 R170.1 R178.1 R181.1 R187.2 R189.2 U1.5 U7.1 U9.3 U10.5 U11.4 U12.4 U18.5 U20.5 U21.2 U21.5 U22.A3 U22.G3 U23.5 U24.A3 U24.G3 U26.21 U28.4 U29.4 U32.4 U33.5 U35.5 U36.16 | length 4144.7
  Top Layer w4.7: v1(610,2935) 611.26,2933.74 R107.1@645.67,2933.74 ; v1(610,2975) 612.05,2977.05 R106.1@645.67,2977.05 ; v1(610,3675) R94.1@644.87,3675 ; v1(610,3720) R93.1@644.87,3720 ; v1(1700,445) R113.1@1700,479.87 ; v1(1760,770) 1767.01,762.99 U21.5@1767.01,720 ; U21.2@1814.26,720 1814.26,769.26 1815,770 v1(1820,770) ; v1(2240,820) 2254.3,805.7 2281.88,805.7 U22.G3@2281.88,805.63 ; U22.A3@2400,805.63 2479.37,805.63 v1(2480,805) ; U24.A3@3215.2,805.43 U24.A3@3215,805.63 3215,805.3 3309.7,805.3 v1(3315,800) ; R156.2@3575,704.87 v1(3575,740) ; R155.1@4070,510.13 v1(4070,650) ; R178.1@4685,1070.13 v1(4685,1105) ; R151.1@5452.76,1886.27 v1(5452.76,1917.32) ; R149.1@5496.06,1886.27 v1(5496.06,1917.32) ; R148.1@5582.68,1886.27 v1(5582.68,1917.32) ; R145.2@5754.87,1625 5787.68,1625 v1@5790,1627.32 ; v1(6020,4160) 6035.13,4160 R38.2@6055.13,4140 ; v1(6210,3755) R40.2@6210,3805.13 ; v1(6255,3755) R39.2@6255,3805.13
  Top Layer w8: U23.5@2799.4,1060.18 2799.4,990.73 C147.1@2800,990.13 ; C150.2@2964.87,840 3005,840 3039.37,805.63 U24.G3@3096.88,805.63 ; v1(6270,3920) 6273.58,3923.58 U11.4@6273.58,3985.2
  Top Layer w10: v1(4525,2550) 4526.18,2551.18 M1.D15@4586.61,2551.18 4633.82,2551.18 v1(4635,2550) ; v1(4525,2570) 4525.87,2570.87 M1.D13@4586.61,2570.87 4634.13,2570.87 v1(4635,2570) ; v1(4525,2590) v1@4525.55,2590.55 ; v1(4670,2550) 4671.18,2551.18 M1.D16@4720.47,2551.18 4778.82,2551.18 v1(4780,2550) ; v1(4670,2570) 4670.87,2570.87 M1.D14@4720.47,2570.87 4779.13,2570.87 v1(4780,2570) ; v1(4670,2590) 4670,2600 4680.24,2610.24 M1.D10@4720.47,2610.24 4759.76,2610.24 v1@4779.45,2590.55 ; v1@4670.55,2590.55 M1.D12@4720.47,2590.55 v1@4779.45,2590.55 ; v1(4780,2590) v1@4779.45,2590.55 ; U1.5@6255.91,880.28 6255.91,925.64 R3.1@6259.4,929.13 6259.4,968.06 v1(6259.84,968.5) ; v1@4525.55,2590.55 4545.24,2610.24 M1.D9@4586.61,2610.24 4629.76,2610.24 4634.45,2605.55 4634.45,2590.55 M1.D11@4586.61,2590.55 v1@4525.55,2590.55
  Top Layer w12: U20.5@833.66,2969.17 869.17,2969.17 v1(870,2970) ; U18.5@835,3715 v1(870,3715) ; v1(1125,4285) R170.1@1125,4314.87 ; v1(1720,775) C128.2@1720,805.13 ; v1(2130,2635) 2132.01,2632.99 R189.2@2163.29,2632.99 ; C134.2@2144.87,840 v1(2180,840) ; R187.2@2163.29,2719.61 2163.29,2751.71 v1(2165,2753.42) ; v1(2480,805) 2510,805 2520,815 C135.2@2548.5,815 ; v1(3315,800) 3325,800 3340,815 C151.2@3363.5,815 ; Q9.2@3725,985 3725,1005 3704.87,1025.13 R154.2@3704.87,1045 v1(3740,1045) ; R61.1@5010.13,4915 5025,4915 5045,4895 v1(5065,4895) ; v1(5235,2415) 5235.13,2415.13 R32.1@5265,2415.13 ; v1(5295,2190) R31.1@5324.87,2190 5324.87,2225.13 U10.5@5315,2235 ; U26.21@5612.34,1704.73 5653.55,1704.73 5665.35,1716.54 5666.89,1715 C170.1@5714.87,1715 ; v1(6345,3475) C196.1@6379.87,3475 6380,3474.87 6380,3445 6375,3440 U35.5@6375,3415
  Top Layer w15: U36.16@5500,4385 5500,4330 5495,4325 5495,4295.13 C199.1@5495.13,4295 v1(5530,4295)
  Top Layer w20: v2(5270,1970) 5270,1918.98 5277.48,1911.5 L22.1@5345,1911.5
  Bottom Layer w4.7: R158.1@1355,1340.13 v1(1355,1375) ; v1(1700,445) 1725,470 R114.1@1725,479.87
  Bottom Layer w12: C98.1@750,2614.87 C98.1@751.37,2613.5 ; v1(1110,4825) 1110.13,4825.13 R181.1@1145,4825.13 ; U33.5@1290,4775 v1(1325,4775) ; v1(4385,3265) R142.2@4415.13,3265 ; R41.2@6224.87,4015 6224.87,3975.13 6245,3955 6274.87,3955 C36.1@6275,3954.87 6275,3925 v1(6270,3920) 6280,3910 C35.1@6280,3870 ; v1(7149.61,1507.87) 7184.6,1507.87 R23.1@7185.04,1508.32
  Bottom Layer w15: C68.1@750,3359.87 770.13,3359.87 775,3355 808.5,3355 L13.1@810,3353.5 v1(810,3310) ; C98.1@751.37,2613.5 L17.1@810,2613.5 v1(810,2565)
  Bottom Layer w20: v1(840,4850) J17.1@840,4930 ; v1(6430,3965) L5.1@6430,4008.5
  other v1: 2995,840 4775,995 4805,995 4775,1020 4805,1020 2800,1025 2060,1515 2105,1515 2060,1555 2105,1555 2060,1595 2105,1595 5790,1625 2060,1635 2105,1635 4635,2590
  other v2: 1145,1215 1185,1215 1225,1215 1145,1255 1185,1255 1225,1255 1145,1295 1185,1295 1225,1295 6429.13,1657.48 6472.44,1657.48 6515.75,1657.48 6559.06,1657.48 6897.64,1673.23 6937.01,1673.23 6980.32,1673.23 7019.68,1673.23 6429.13,1692.91 6472.44,1692.91 6515.75,1692.91 6559.06,1692.91 6897.64,1708.66 6937.01,1708.66 6980.31,1708.66 7019.68,1708.66 5665,1715 6429.13,1728.35 6472.44,1728.35 6515.75,1728.35 6559.06,1728.35 6897.64,1744.09 6937.01,1744.09 6980.31,1744.09 7019.68,1744.09 1035,4420 1035,4470 1075,4470 4950,4740 4990,4740 5030,4740 5070,4740 4950,4780 4990,4780 5030,4780 5070,4780 4950,4820 4990,4820 5030,4820 5070,4820
P5V0: C12.1 C133.2 C149.2 C167.1 C194.1 C195.1 L2.2 R18.1 R144.2 R147.1 U6.1 U22.A2 U22.C2 U24.A2 U24.C2 U25.1 U25.4 U25.7 U27.7 U34.3 U35.1 | length 8404.1
  Top Layer w3: U22.C2@2360.63,825.31 2370.81,835.49 2370.81,857.81 2371,858 ; U24.C2@3175.63,825.31 3185.13,834.81 3185.13,860
  Top Layer w4.7: 2371,858 2371,872 2377,878 ; 3185.13,860 3185.13,880 3195,889.87 3195,890 ; R147.1@5625.98,1886.27 5668.85,1886.27 v1(5669.29,1885.83)
  Top Layer w8: U22.A2@2400,825.31 2440.31,825.31 2450,835 ; U24.A2@3215,825.31 3219.69,830 3245,830
  Top Layer w12: 2377,878 2409,910 2475,910 2485,900 2485,890 ; 2450,835 2485,870 2485,890 ; C133.2@2549.13,890 2485,890 ; 3195,890 3220,915 3280,915 3305,890 ; 3245,830 3270,830 3305,865 3305,890 ; C149.2@3364.13,890 3305,890 ; v1(7169.29,692.91) R18.1@7235.78,692.91
  Top Layer w15: C133.2@2549.13,890 2549.13,919.13 2575,945 2680,945 2700,925 v2(2700,555) ; C149.2@3364.13,890 3364.13,929.13 3385,950 3475,950 3510,915 v2(3510,555) ; C195.1@6315,3329.87 6374.87,3329.87 U35.1@6375,3330 6375,3365 6385,3375 6460,3375 6475.13,3359.87 C194.1@6520,3359.87 6520.13,3360 6565,3360 6570,3355 U34.3@6622.64,3355
  Top Layer w20: v1(3770,715) v1(3795,715) U27.7@3867.36,715 v1(3955,715)
  Top Layer w25: v2(6005,3340) 6225,3340 ; C195.1@6315,3329.87 6235.13,3329.87 6225,3340 ; 6430,1050 6427.5,1052.5 6382.5,1052.5 6325,1110 6325,2080 6185,2220 6105,2220 5995,2330 5995,2645 6225,2875 6225,3340
  Bottom Layer w4.7: v1(5291.34,1145.67) 5302.95,1145.67 U25.1@5326.57,1122.05 ; U25.4@5476.57,1122.05 v1(5511.81,1122.05) ; v1(5669.29,1885.83) 5716.54,1838.58 5716.54,1614.17 5712.6,1610.24 v1(5712.6,1047.24)
  Bottom Layer w25: R144.2@4384.33,3368.39 4338.39,3368.39 4315,3345 4315,3235 4345,3205 5870,3205 v2(6005,3340)
  other v1: 3930,715
  other v2: 2700,580 3510,580 5338.58,1007.87 5377.95,1007.87 6917.32,1031.5 6952.76,1031.5 6988.19,1031.5 7023.62,1031.5 6444.88,1035.43 6484.25,1035.43 6523.62,1035.43 6562.99,1035.43 5338.58,1043.31 5377.95,1043.31 6444.88,1066.93 6484.25,1066.93 6523.62,1066.93 6562.99,1066.93 6917.32,1066.93 6952.76,1066.93 6988.19,1066.93 7023.62,1066.93 6444.88,1098.43 6484.25,1098.43 6523.62,1098.43 6562.99,1098.43 6917.32,1102.36 6952.76,1102.36 6988.19,1102.36 7023.62,1102.36
PCIE-PWR-EN: M1.A20 R160.2 U28.5 | length 3671.5
  Top Layer w4.7: M1.A20@2460.63,3594.49 2461.14,3595 v1(2675,3595)
  Bottom Layer w4.7: U28.5@1310.63,1228.11 1310.63,1299.5 R160.2@1310,1300.13 1310.13,1300.13 1330,1320 1330,1555 1470,1695 2365,1695 2675,2005 v1(2675,3595)
PCIE-RST: M1.A18 R169.2 | length 4466.1
  Top Layer w4.7: M1.A18@2460.63,3614.17 2461.46,3615 v1(2645,3615)
  Bottom Layer w4.7: R169.2@970,644.87 970,1370 1315,1715 2355,1715 2655,2015 2655,3570 2645,3580 v1(2645,3615)
PERI-RST: M1.A16 R33.1 | length 3650.9
  Top Layer w4.7: M1.A16@2460.63,3633.86 3393.86,3633.86 v1(3395,3635) ; v1(3820,3635) 3820,3530 4010,3340 4135,3340 4450,3025 4685,3025 4705,3005 v1(4705,2925) ; R33.1@5310,2415.13 v1(5310,2580)
  Bottom Layer w4.7: v1(3395,3635) v1(3820,3635) ; v1(4705,2925) 4815,2925 4890,2850 4890,2695 5005,2580 v1(5310,2580)
PHY-RX-CLK: R34.2 R55.2 U11.33 | length 214.9
  Top Layer w4.7: R34.2@6147.6,4335.4 6190.91,4335.4 6190.91,4309.09 6205,4295 6250,4295 6273.58,4271.42 U11.33@6273.58,4224.38
PMIC-ON-REQ: M1.D22 Q2.2 R11.1 | length 2717.6
  Top Layer w4.7: M1.D22@4720.47,2492.13 4817.87,2492.13 4860,2450 v1(4905,2450)
  Bottom Layer w4.7: v1(4905,2450) 5040,2450 5120,2370 5630,2370 6120,1880 6120,1120 5988.19,988.19 Q2.2@5988.19,933.27 5972.64,933.27 5953.2,913.83 R11.1@5933.07,913.83
PMIC-PWRON: M1.D60 Q2.3 Q3.2 R14.1 | length 2737
  Top Layer w4.7: M1.D60@4720.47,2118.11 4761.89,2118.11 4780,2100 v1(4780,2050) ; Q3.2@6023.62,838.58 6043.31,838.58 6058.61,853.89 R14.1@6082.68,853.89 6117.67,853.89 v1(6118.11,854.33)
  Bottom Layer w4.7: v1(4780,2050) 5650,2050 5825,1875 5825,880 5880,825 6040,825 6068.19,853.19 Q2.3@6068.19,896.27 6107.67,896.27 6118.11,885.83 v1(6118.11,854.33)
POR-B: D12.2 M1.D18 U33.4 | length 6193.8
  Top Layer w4.7: v1(1325,4825) v1(1440,4825) ; v1(2400,3920) v1(2545,3920) ; v1(4120,3680) v1(4265,3680) ; M1.D18@4720.47,2531.5 4801.5,2531.5 v1(4820,2550) ; D12.2@5385,2370 v1(5385,2565)
  Bottom Layer w4.7: U33.4@1290,4826.2 1323.8,4826.2 v1(1325,4825) ; v1(1440,4825) 1440,4605 2125,3920 v1(2400,3920) ; v1(2545,3920) 4065,3920 4120,3865 v1(4120,3680) ; v1(4265,3680) 4240,3655 4240,3005 4385,2860 4815,2860 4855,2820 4855,2563.65 ; v1(4820,2550) 4833.65,2563.65 4855,2563.65 ; v1(5385,2565) 5383.65,2563.65 4855,2563.65
PVDD-1V8-VIDEO1: C73.1 C74.1 C88.2 C90.2 L11.2 U17.20 | length 281.9
  Top Layer w10: U17.20@1156.69,3681.69 1166.69,3681.69 v1(1185,3700)
  Bottom Layer w15: C90.2@1155,3699.87 1207.31,3699.87 1210,3702.56 ; C88.2@1210.13,3645 1209.87,3645.25 C73.1@1209.87,3690 1210,3690.13 1210,3702.56 ; L11.2@1218.5,3830 1218.5,3756.5 C74.1@1220,3755 1220,3725 1210,3715 1210,3702.56
PVDD-1V8-VIDEO2: C103.1 C104.1 C118.2 C120.2 L15.2 U19.20 | length 280.6
  Top Layer w10: U19.20@1156.69,2941.69 1176.69,2941.69 v1(1185,2950)
  Bottom Layer w15: C120.2@1155,2954.87 1170.13,2954.87 1175,2950 v1(1185,2950) C103.1@1209.87,2950 ; C118.2@1210.13,2905 1210.13,2949.75 C103.1@1209.87,2950 ; C104.1@1225,3015 1225,2985 1209.87,2969.87 C103.1@1209.87,2950
  Bottom Layer w20: L15.2@1223.5,3090 1223.5,3016.5 C104.1@1225,3015
RGMII-INT: M1.C34 R39.1 U11.5 | length 1903.2
  Top Layer w4.7: M1.C34@4720.47,3574.8 5529.8,3574.8 5750,3795 6010,3795 6070,3735 6225,3735 6235,3745 6235,3835 6245.13,3845.13 R39.1@6255,3845.13 6289.33,3879.45 U11.5@6289.33,3985.2
RGMII-LED-10-100: R37.1 U11.26 | length 1545.7
  Top Layer w4.7: U11.26@6383.82,4224.38 6383.82,4253.82 6395,4265 6420,4265 6430,4255 v1(6430,4245)
  Bottom Layer w4.7: v1(6430,4245) 6580,4245 6595,4230 6595,3640 6635,3600 7145,3600 7190,3645 R37.1@7190,3704.87
RGMII-LED-1000: R45.1 R49.1 R57.2 U11.24 | length 516
  Top Layer w4.7: U11.24@6432.54,4191.4 6491.4,4191.4 6575,4275 6575,4395 6644.87,4464.87 R45.1@6644.87,4495 R49.1@6644.87,4585
RGMII-LED-ACT: R35.1 R50.1 R58.2 U11.23 | length 1206.6
  Top Layer w4.7: U11.23@6432.54,4175.66 6500.66,4175.66 6595,4270 6595,4365 6670,4440 v1(6725,4440) ; v1(7230,4545) R50.1@7230,4505.13 7230.25,4504.87 R58.2@7320,4504.87
  Bottom Layer w4.7: v1(6725,4440) 6750,4465 6945,4465 6970,4440 7210,4440 7230,4460 v1(7230,4545)
RGMII-MDC: M1.C36 U11.1 | length 1750.7
  Top Layer w4.7: M1.C36@4720.47,3555.12 5545.12,3555.12 5765,3775 v1(5795,3775) ; v1(5795,3860) 5895,3860 5980,3945 6215,3945 6226.34,3956.34 U11.1@6226.34,3985.2
  Bottom Layer w4.7: v1(5795,3775) v1(5795,3860)
RGMII-MDIO: M1.C38 R41.1 U11.48 | length 1803
  Top Layer w4.7: M1.C38@4720.47,3535.43 5560.43,3535.43 5775,3750 v1(5820,3750) ; v1(5820,3885) 5890,3885 5970,3965 6105,3965 v1(6140,4000) 6158.18,4018.18 U11.48@6193.36,4018.18
  Bottom Layer w4.7: v1(5820,3750) v1(5820,3885) ; v1(6140,4000) 6155,4015 R41.1@6184.87,4015
RGMII-NRST: M1.C30 R42.1 | length 1552.6
  Top Layer w4.7: M1.C30@4720.47,3614.17 5499.17,3614.17 5725,3840 6050,3840 6085,3805 6164.87,3805 R42.1@6165,3804.87